# Altium PCB SolderingStation_V6.PcbDoc (part 2 of 2)
Units mm, origin at the board's own origin, x right, y up, seen from the top; angles counter-clockwise.
Board outline 138.15 x 60.81 mm, 2 copper layers (Top Layer, Bottom Layer), stack 1.671 mm thick; 179 components, 105 nets, 526 pads, 400 vias.
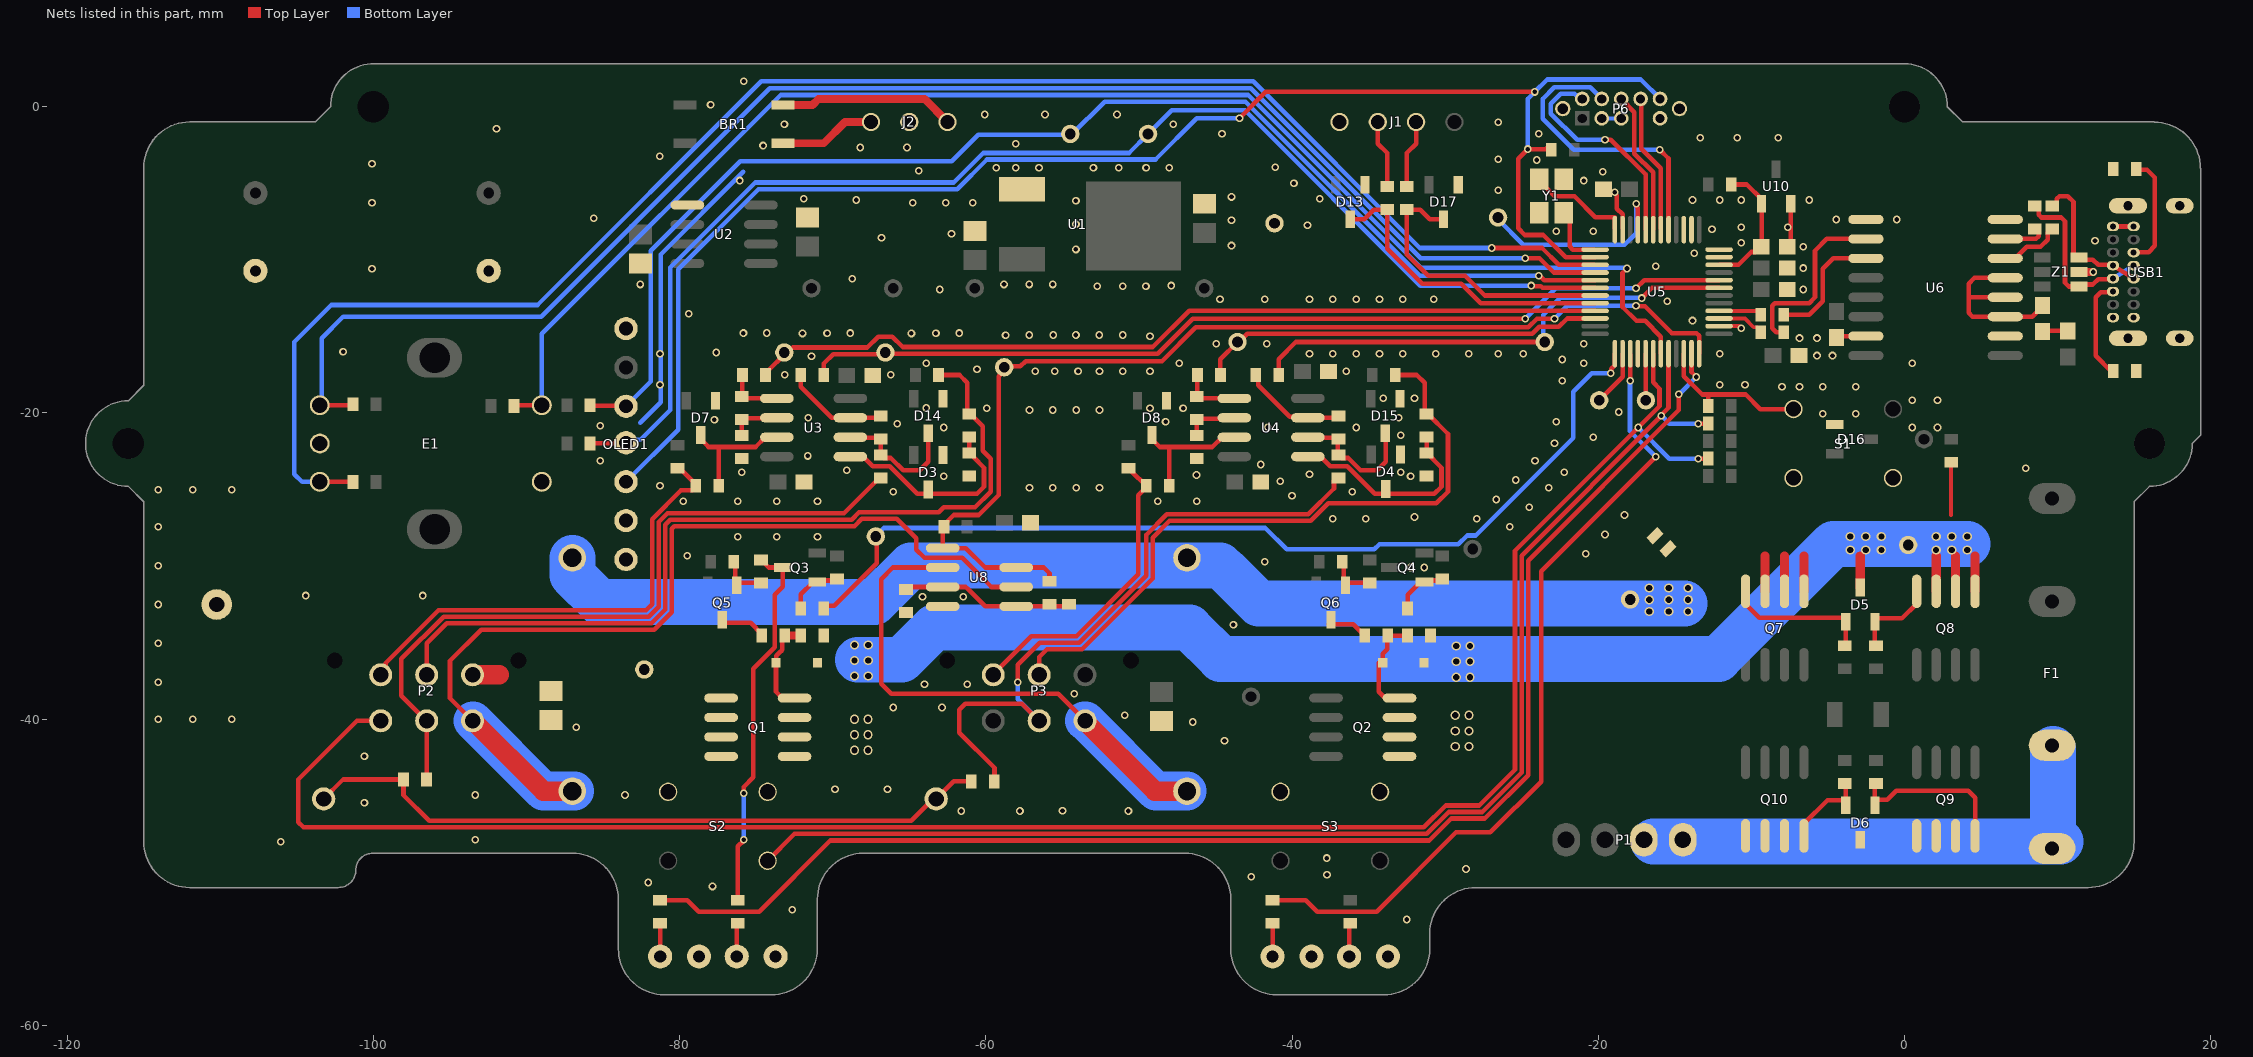
[diagram p2: the nets of this part, all layers, seen from the top]

## Via types
v1: diameter 0.5, hole 0.3, Top Layer to Bottom Layer, tented both sides, 337 vias
v2: diameter 0.6, hole 0.4, Top Layer to Bottom Layer, tented both sides, 63 vias

## Nets (pads, with @x,y where several pads share a name; then routed paths per layer and width w, separated by ;. In a path a pad name is that pad's centre, name@x,y a point inside that pad or via, vN(x,y) a via of type N, cw(c..) or ccw(c..) an arc to the next point about the centre after c; other vN are vias at no path point) (continued)
CH1_NTC: P3.6 R30.2 R55.1 | length 19.4
  Top Layer w0.3: P3.6@-59.515,-37.108 -59.515,-37.067 -57.027,-34.579 -54.075,-34.579 -50.038,-30.542 -50.038,-25.385 R30.2@-49.518,-24.865 ; R55.1@-50.46,-23.832 R30.2@-49.567,-24.725
CH1_NTC_B: R63.1 TP_NTC1.1 U5.34 | length 26.6
  Top Layer w0.3: R63.1@-44.678,-17.526 -44.678,-16.484 TP_NTC1.1@-43.561,-15.367 -43.47,-15.367 -42.935,-14.832 -24.311,-14.832 -23.849,-14.37 -22.575,-14.37 -22.037,-13.832 U5.34@-20.21,-13.832
CH1_Ret: P3.1 R26.2 U8.2 | length 42.7
  Top Layer w0.3: U8.2@-62.814,-30.099 -66.079,-30.099 -66.839,-30.859 -66.839,-37.696 -66.181,-38.354 -55.269,-38.354 P3.1@-53.515,-40.108
  Top Layer w1.27: P3.1@-53.562,-40.103 -48.961,-44.704 R26.2@-46.863,-44.704
  Bottom Layer w2.54: P3.1@-53.515,-40.108 -53.491,-40.108 -48.895,-44.704 R26.2@-46.863,-44.704
CH1_SB: D17.3 R65.1 U5.31 | length 19
  Top Layer w0.3: D17.3@-30.099,-7.348 -31.006,-7.348 -31.497,-6.857 -31.635,-6.719 R65.1@-32.512,-6.719 -32.512,-9.652 -31.115,-11.049 -28.702,-11.049 -27.419,-12.332 U5.31@-20.21,-12.332
CH1_SEL: R47.1 U5.39 | length 53.1
  Top Layer w0.3: R47.1@-41.275,-51.828 -39.104,-51.828 -38.354,-52.578 -34.477,-52.578 -29.292,-47.393 -27.042,-47.393 -23.727,-44.078 -23.727,-30.331 v1(-16.256,-22.86) ; U5.39@-17.91,-16.182 -17.907,-16.185 v1(-17.907,-17.907)
  Bottom Layer w0.3: v1(-17.907,-17.907) -17.926,-17.926 -17.926,-21.19 v1(-16.256,-22.86)
CH1_TC: R61.1 TP_TC1.1 U5.7 | length 32.9
  Top Layer w0.3: R61.1@-40.868,-17.526 -40.868,-16.484 -39.751,-15.367 TP_TC1.1@-23.495,-15.367 ; v1(-17.157,-12.499) -16.49,-11.832 U5.7@-12.11,-11.832
  Bottom Layer w0.3: TP_TC1.1@-23.495,-15.367 -23.595,-15.267 -23.595,-13.603 -22.806,-12.814 -22.472,-12.48 -17.176,-12.48 v1(-17.157,-12.499)
CH1_Thm+: P3.5 R14.1 R16.2 | length 43.5
  Top Layer w0.3: P3.5@-56.515,-37.108 -56.515,-35.941 -56.007,-35.433 -53.721,-35.433 -49.103,-30.815 -49.103,-28.148 -48.006,-27.051 -38.766,-27.051 -37.623,-25.908 -30.574,-25.908 -29.812,-25.146 -29.812,-21.375 R16.2@-31.109,-20.078 ; R14.1@-33.215,-17.526 -31.844,-17.526 -31.336,-18.034 R16.2@-31.336,-19.951
CH1_Thm-: P3.2 R23.1 R32.2 | length 43.6
  Top Layer w0.3: R32.2@-59.448,-44.069 -59.436,-44.057 -59.436,-43.18 -61.734,-40.882 -61.734,-39.382 -61.341,-38.989 -57.634,-38.989 P3.2@-56.515,-40.108 ; v1(-57.912,-37.592) -57.912,-36.449 -56.469,-35.006 -53.898,-35.006 -49.53,-30.638 -49.53,-27.971 -48.183,-26.624 -38.943,-26.624 -37.257,-24.938 -37.257,-24.445 -37.057,-24.245 R23.1@-36.957,-24.245
  Bottom Layer w0.3: v1(-57.912,-37.592) -57.912,-38.711 P3.2@-56.515,-40.108
CH2_ACT: Q3.3 R9.2 R52.2 | length 24.6
  Top Layer w0.3: R52.2@-76.2,-51.828 -76.2,-48.314 -75.819,-47.933 v1(-75.819,-47.879) ; v1(-75.819,-44.831) -75.819,-44.432 -75.184,-43.797 -75.184,-36.703 -73.787,-35.306 -73.787,-31.877 -73.261,-31.351 Q3.3@-73.261,-30.099 -74.18,-30.099 -74.376,-29.903 -74.376,-29.803 -74.576,-29.603 R9.2@-74.676,-29.603
  Bottom Layer w0.3: v1(-75.819,-47.879) v1(-75.819,-44.831)
CH2_BTN: R38.1 S2.2 U5.44 | length 86.2
  Top Layer w0.3: S2.2@-74.25,-49.25 -72.498,-47.498 -31.208,-47.498 -29.776,-46.066 -27.586,-46.066 -25.008,-43.488 -25.008,-29.326 v1(-15.875,-20.193) -15.875,-20.139 -15.41,-19.674 U5.44@-15.41,-16.132 ; v1(-13.462,-20.701) -12.853,-20.701 -12.834,-20.72 R38.1@-12.815,-20.701
  Bottom Layer w0.3: v1(-15.875,-20.193) -15.863,-20.193 -15.355,-20.701 v1(-13.462,-20.701)
CH2_DRV: R7.2 TP_D2.1 U5.37 | length 63.6
  Top Layer w0.3: R7.2@-70.586,-32.766 -70.586,-32.762 -70.426,-32.603 -69.903,-32.603 -67.126,-29.826 -67.126,-27.997 TP_D2.1@-67.183,-27.94 ; v1(-19.177,-17.399) -19.139,-17.361 -19.139,-17.111 -18.91,-16.882 U5.37@-18.91,-16.132
  Bottom Layer w0.3: TP_D2.1@-67.271,-28.374 TP_D2.1@-67.01,-28.113 ; TP_D2.1@-67.183,-27.94 -67.098,-27.94 -66.675,-27.517 -41.755,-27.517 -40.356,-28.915 -34.63,-28.915 -34.29,-28.575 -29.139,-28.575 -28.569,-28.005 -28.005,-28.005 -21.636,-21.636 -21.636,-18.619 -20.416,-17.399 v1(-19.177,-17.399)
CH2_Htr: C24.1 P2.4 Q1.5 Q1.6 Q1.7 Q1.8 TP_H2.1 | length 1.7
  Top Layer w1.27: P2.4@-93.505,-37.103 -91.783,-37.103
CH2_ID: P2.3 R64.1 U5.42 | length 127.6
  Top Layer w0.3: P2.3@-99.52,-40.108 -101.068,-40.108 -104.902,-43.942 -104.902,-46.736 -104.567,-47.071 -31.385,-47.071 -29.953,-45.639 -27.763,-45.639 -25.435,-43.311 -25.435,-28.991 v1(-17.399,-20.955) -16.002,-19.558 -16.002,-18.415 -16.41,-18.007 U5.42@-16.41,-16.132 ; v1(-13.462,-22.987) R64.1@-12.815,-22.987
  Bottom Layer w0.3: v1(-17.399,-20.955) -15.367,-22.987 v1(-13.462,-22.987)
CH2_NTC: P2.6 R29.2 R54.1 | length 30.6
  Top Layer w0.3: P2.6@-99.52,-37.108 -99.52,-36.783 -99.198,-36.461 -99.198,-36.333 -95.747,-32.882 -82.192,-32.882 -81.799,-32.489 -81.799,-26.95 -79.914,-25.065 -79.144,-25.065 -78.944,-24.865 -78.944,-24.665 R54.1@-79.837,-23.772
CH2_NTC_B: R62.1 TP_NTC2.1 U5.33 | length 57.3
  Top Layer w0.3: R62.1@-74.396,-17.526 -74.396,-17.426 -74.196,-17.226 -73.164,-16.194 TP_NTC2.1@-73.164,-16.055 ; TP_NTC2.1@-73.044,-16.174 -72.6,-15.73 -67.733,-15.73 -67.017,-15.014 -66.103,-15.014 -65.423,-15.693 -49.094,-15.693 -46.717,-13.316 U5.33@-20.982,-13.316 ; U5.33@-20.21,-13.332 -20.96,-13.332 -20.963,-13.335 U5.33@-20.982,-13.316 ; U5.33@-20.21,-13.316 U5.33@-20.982,-13.316
CH2_Ret: P2.1 R25.2 U8.6 | length 67.7
  Top Layer w0.3: P2.1@-93.525,-40.103 -94.996,-38.632 -94.996,-36.195 -92.964,-34.163 -81.661,-34.163 -80.518,-33.02 -80.518,-27.573 -80.342,-27.397 -68.576,-27.397 -68.103,-26.924 -65.807,-26.924 -64.537,-28.194 -64.537,-28.935 -64.006,-29.466 -61.531,-29.466 -59.628,-31.369 U8.6@-58.014,-31.369
  Top Layer w1.27: P2.1@-93.5,-40.103 -88.899,-44.704 R25.2@-87.007,-44.704
  Bottom Layer w2.54: P2.1@-93.496,-40.108 -88.9,-44.704 R25.2@-86.868,-44.704
CH2_SB: D13.3 R66.1 U5.32 | length 20.3
  Top Layer w0.3: D13.3@-36.195,-7.348 -35.288,-7.348 -34.659,-6.719 R66.1@-33.782,-6.719 -33.782,-9.271 -31.496,-11.557 -28.956,-11.557 -27.681,-12.832 U5.32@-20.21,-12.832
CH2_SEL: R50.2 U5.47 | length 93
  Top Layer w0.3: R50.2@-81.28,-51.828 -79.49,-51.828 -78.74,-52.578 -74.803,-52.578 -70.15,-47.925 -31.032,-47.925 -29.6,-46.493 -27.409,-46.493 -24.581,-43.665 -24.581,-29.661 -14.732,-19.812 -14.732,-18.796 v1(-14.751,-18.777) ; U5.47@-13.91,-16.132 -13.91,-17.332 v1(-13.589,-17.653)
  Bottom Layer w0.3: v1(-14.751,-18.777) -14.713,-18.777 v1(-13.589,-17.653)
CH2_TC: R60.1 TP_TC2.1 U5.8 | length 61.5
  Top Layer w0.3: R60.1@-70.586,-17.526 -70.586,-16.776 -69.967,-16.157 TP_TC2.1@-66.56,-16.157 ; TP_TC2.1@-66.56,-16.055 -66.486,-16.129 -48.768,-16.129 -46.482,-13.843 v1(-24.765,-13.843) ; v1(-17.538,-11.864) -17.006,-11.332 U5.8@-12.11,-11.332
  Bottom Layer w0.3: v1(-24.765,-13.843) -22.786,-11.864 v1(-17.538,-11.864)
CH2_Thm+: P2.5 R13.1 R15.2 | length 56.1
  Top Layer w0.3: P2.5@-96.52,-37.108 -96.52,-35.052 -95.204,-33.736 -81.838,-33.736 -80.945,-32.843 -80.945,-27.304 -80.611,-26.97 -68.753,-26.97 -68.28,-26.497 -63.073,-26.497 -62.738,-26.162 -60.706,-26.162 -59.69,-25.146 -59.69,-22.987 -60.198,-22.479 -60.198,-20.867 -60.987,-20.078 R15.2@-61.087,-20.078 -61.214,-19.951 -61.214,-18.034 -61.722,-17.526 R13.1@-63.093,-17.526
CH2_Thm-: P2.2 R21.1 R31.2 | length 47.9
  Top Layer w0.3: R31.2@-96.532,-43.942 -96.514,-43.924 P2.2@-96.514,-40.126 ; P2.2@-96.52,-40.108 -96.544,-40.108 -98.171,-38.481 -98.171,-36.068 -95.412,-33.309 -82.015,-33.309 -81.372,-32.666 -81.372,-27.127 -80.788,-26.543 -69.263,-26.543 -67.003,-24.284 R21.1@-66.926,-24.284
EARTH: ER1.1 ER2.1 R31.1 R32.1 | length 45.7
  Top Layer w0.3: ER2.1@-103.251,-45.212 -101.981,-43.942 R31.1@-98.032,-43.942 -98.032,-44.97 -96.358,-46.644 -64.868,-46.644 ER1.1@-63.24,-45.016 ; ER1.1@-63.246,-45.212 -62.103,-44.069 R32.1@-60.948,-44.069
EXTAL: U5.24 Y1.3 | length 6.8
  Top Layer w0.3: Y1.3@-23.86,-4.732 -23.86,-4.832 -22.85,-5.842 -21.552,-5.842 -20.185,-7.209 -18.931,-7.209 -18.91,-7.23 U5.24@-18.91,-7.982
EXTAL33: U5.15
GND: C1.1 C2.1 C3.2 C4.1 C5.1 C6.1 C8.2 C9.2 C10.2 C11.2 C13.1 C14.1 C15.1 C16.1 C18.1 C19.2 C20.1 C24.2 C25.2 D3.1 D4.1 D7.1 D8.1 D9.K D10.K D11.K D12.K D13.1 D14.1 D15.1 D16.1 D17.1 E1.C E1.D Gnd1.1 J1.4 J2.2 N1.1 NT1.2 OLED1.1 OLED1.2 OLED1.7 P6.0 P6.3 P6.5 P6.9 R17.1 R18.1 R35.1 R36.1 R69.1 S1.1 S1.1b S2.1 S2.1b S3.1 S3.1b U1.1 U2.5 U5.2 U5.11 U5.12 U5.23 U6.9 U6.15 U8.4 U10.2 Y1.2 Y1.4 | length 30.6
  Top Layer w0.254: P6.9@-15.961,-0.765 P6.9@-15.964,-0.762 P6.9@-15.94,-0.762 ; P6.0@-14.694,-0.329 P6.0@-14.694,-0.127 ; U5.2@-12.11,-14.332 -10.814,-14.332 v1(-10.668,-14.478)
  Top Layer w0.3: C14.1@-19.564,-5.726 C14.1@-19.564,-5.544 ; v1(-18.923,-5.588) -18.923,-5.642 -18.785,-5.78 -18.785,-6.661 -18.41,-7.036 U5.23@-18.41,-7.982 ; C18.1@-7.659,-9.144 -7.432,-8.917 U10.2@-7.432,-6.332 ; C16.1@-6.897,-16.256 C16.1@-6.731,-16.09 ; C20.1@-4.572,-14.986 U6.15@-2.087,-14.986
  Bottom Layer w0.254: P6.3@-19.774,-0.762 P6.5@-18.504,-0.762 ; P6.9@-15.964,-0.762 P6.9@-15.94,-0.762
  Bottom Layer w0.3: -82.583,-20.645 -81.242,-19.304 -81.242,-9.652 -75.834,-4.244
  other v1: -32.512,-53.086 -72.644,-52.451 -77.851,-50.927 -82.042,-50.673 -42.672,-50.292 -37.719,-50.165 -28.638,-49.786 -37.731,-49.075 -106.045,-48.006 -93.345,-47.879 -61.595,-46 -57.772,-46 -50.686,-46 -54.991,-45.974 -100.584,-45.466 -93.345,-44.958 -83.566,-44.958 -69.85,-44.577 -66.421,-44.577 -100.584,-42.418 -44.412,-41.402 -86.754,-40.538 -46.494,-40.185 -114.04,-40.012 -111.8,-40.012 -109.26,-40.012 -50.927,-39.751 -66.04,-39.243 -62.865,-39.243 -54.229,-38.354 -64.008,-37.719 -61.214,-37.719 -114.04,-37.592 -114.04,-35.052 -43.827,-33.835 -114.04,-32.512 -64.135,-32.004 -61.468,-32.004 -104.406,-31.93 -96.786,-31.93 -32.258,-30.099 -31.369,-30.099 -114.04,-29.972 -41.783,-29.718 -79.502,-29.337 -20.828,-29.21 -76.2,-28.086 -73.66,-28.086 -70.993,-28.086 -19.558,-27.94 -114.04,-27.432 -25.784,-27.429 -37.338,-26.924 -35.179,-26.924 -27.94,-26.924 -32.004,-26.797 -18.288,-26.67 -24.514,-26.159 -79.756,-25.781 -76.2,-25.781 -73.66,-25.781 -70.993,-25.781 -48.768,-25.781 -46.228,-25.781 -26.67,-25.654 -40.005,-25.4 -66.04,-25.146 -36.068,-25.146 -114.04,-25.012 -111.8,-25.012 -109.26,-25.012 -57.15,-24.892 -55.626,-24.892 -54.102,-24.892 -52.578,-24.892 -23.244,-24.889 -81.28,-24.765 -40.78,-24.46 -25.4,-24.384 -62.738,-24.13 -32.258,-24.13 -46.24,-24.056 -38.862,-24.003 -75.946,-23.876 -32.893,-23.876 -22.225,-23.876 -69.088,-23.749 7.912,-23.622 -42.037,-23.368 -85.179,-23.114 -24.13,-23.114 -71.64,-22.811 -22.86,-21.971 -20.32,-21.59 -32.893,-21.463 -62.738,-20.955 -35.814,-20.955 0.508,-20.955 2.159,-20.955 -41.593,-20.93 -85.179,-20.828 -65.786,-20.701 -48.26,-20.574 -22.733,-20.574 -77.724,-20.447 -71.589,-20.322 -33.02,-20.32 -5.334,-20.066 -3.175,-20.066 -18.669,-19.939 -57.15,-19.812 -55.626,-19.812 -54.102,-19.812 -52.578,-19.812 -63.881,-19.677 -59.944,-19.685 -49.276,-19.685 -47.117,-19.685 0.508,-19.177 2.159,-19.177 -34.036,-19.05 -32.004,-19.05 -8.001,-18.288 -6.858,-18.288 -5.334,-18.288 -3.175,-18.288 -81.28,-18.161 -12.065,-18.161 -10.414,-18.161 -22.352,-17.907 -73.139,-17.503 -66.204,-17.503 -56.769,-17.272 -55.499,-17.272 -53.975,-17.272 -52.578,-17.272 -51.054,-17.272 -49.276,-17.272 -36.449,-17.272 -60.579,-17.145 -63.881,-16.764 -47.371,-16.764 -20.955,-16.764 0.508,-16.764 -22.352,-16.51 -71.386,-16.309 -5.715,-16.256 -4.699,-16.256 -81.28,-16.129 -38.862,-16.129 -37.338,-16.129 -35.814,-16.129 -34.29,-16.129 -32.766,-16.129 -30.607,-16.129 -28.448,-16.129 -26.543,-16.129 -24.892,-16.129 -12.065,-16.129 -77.609,-16.055 -101.981,-16.002 -44.958,-15.494 -41.656,-15.494 -20.955,-15.494 -6.858,-15.113 -5.715,-15.113 -49.276,-14.986 -58.711,-14.937 -57.162,-14.912 -55.587,-14.912 -54.114,-14.912 -52.59,-14.912 -51.066,-14.912 -71.97,-14.81 -64.858,-14.81 -75.831,-14.785 -74.308,-14.783 -70.369,-14.787 -68.846,-14.785 -63.257,-14.787 -61.734,-14.785 -13.843,-13.97 -79.412,-13.515 -15.494,-12.7 -44.704,-12.573 -41.783,-12.573 -38.862,-12.573 -37.338,-12.573 -35.814,-12.573 -34.29,-12.573 -32.766,-12.573 -30.734,-12.573 -63.004,-11.94 -6.604,-11.938 -52.717,-11.737 -51.066,-11.737 -49.542,-11.737 -47.879,-11.684 -82.562,-11.61 -58.813,-11.61 -57.162,-11.61 -55.638,-11.61 -68.719,-11.229 -100.088,-10.594 -6.604,-10.541 -16.256,-10.414 -13.728,-9.578 -54.114,-9.324 -6.604,-9.144 -43.954,-9.07 -10.668,-8.89 -66.814,-8.562 -62.242,-8.308 -22.733,-8.128 -20.32,-8.128 -12.573,-8.001 -10.668,-7.874 -7.62,-7.874 -38.989,-7.747 -54.114,-7.673 -43.954,-7.419 -4.445,-7.366 -0.508,-7.366 -85.61,-7.292 -100.088,-6.268 -64.782,-6.276 -62.623,-6.276 -60.845,-6.276 -54.114,-6.149 -68.453,-6.096 -13.843,-6.096 -12.065,-6.096 -10.668,-6.096 -6.223,-6.096 -71.894,-6.022 -38.2,-6.018 -43.954,-5.895 -26.543,-5.461 -39.877,-5.002 -76.073,-4.826 -20.955,-4.826 -19.697,-4.244 -64.389,-4.191 -59.321,-3.99 -58.051,-3.99 -56.527,-3.99 -52.971,-3.99 -51.32,-3.99 -49.534,-3.979 -48.018,-3.99 -41.096,-3.961 -100.088,-3.736 -24.015,-3.482 -26.543,-3.429 -81.292,-3.228 -68.199,-2.667 -65.151,-2.667 -74.549,-2.54 -58.039,-2.413 -13.335,-2.032 -10.922,-2.032 -8.255,-2.032 -44.577,-1.778 -23.876,-1.778 -91.96,-1.45 -73.152,-1.143 -47.752,-1.143 -26.543,-1.016 -60.071,-0.508 -56.134,-0.508 -51.435,-0.508 -77.978,0.127 -75.819,1.651
Gnd_USB: C7.1 C17.1 R39.2 R41.2 U6.2 U6.8 USB1.A1 USB1.A12 USB1.B1 USB1.B12 USB1.SH Z1.2 | length 4.7
  Top Layer w0.3: C17.1@8.724,-14.986 C17.1@9.017,-14.693 ; C17.1@9.017,-14.74 9.113,-14.644 C7.1@10.668,-14.644 ; USB1.A12@13.62,-7.825 USB1.B1@14.97,-7.825
  Top Layer w0.508: C17.1@8.771,-14.986 C17.1@9.017,-14.74 ; Z1.2@11.398,-10.795 v1(12.319,-10.795)
  other v1: 12.446,-8.763
NetBR1_3: BR1.3 J2.3 | length 6.3
  Top Layer w0.508: BR1.3@-73.254,-2.393 -70.592,-2.393 -69.199,-1 J2.3@-67.5,-1
NetBR1_4: BR1.4 J2.1 | length 11.5
  Top Layer w0.508: BR1.4@-73.254,0.107 -71.321,0.107 -70.92,0.508 -64.008,0.508 J2.1@-62.5,-1
NetD1_A: D1.A Q1.4 R1.1 R5.2 | length 5.6
  Top Layer w0.3: D1.A@-73.622,-36.322 D1.A@-73.654,-36.322 ; Q1.4@-73.292,-38.624 -73.702,-38.214 D1.A@-73.702,-36.322 D1.A@-73.654,-36.322 ; R5.2@-73.126,-34.544 -73.286,-34.703 -73.286,-35.478 -73.368,-35.56 -73.385,-35.56 -73.689,-35.863 -73.689,-36.287 D1.A@-73.654,-36.322
  Top Layer w0.508: R5.2@-73.126,-34.544 R1.1@-72.086,-34.544
NetD2_A: D2.A Q2.4 R2.1 R6.2 | length 6
  Top Layer w0.3: D2.A@-34.332,-36.322 -34.332,-38.214 Q2.4@-33.922,-38.624 ; D2.A@-34.078,-36.322 -34.078,-35.729 -33.782,-35.433 -33.782,-34.73 R6.2@-33.655,-34.603 ; D2.A@-34.065,-36.287 -34.065,-35.863 ; R6.2@-33.655,-34.609 R6.2@-33.655,-34.603 ; R2.1@-32.462,-34.544 -33.596,-34.544 R6.2@-33.655,-34.603
NetD3_3: D3.3 R15.1 R17.2 U3.5 | length 13.6
  Top Layer w0.3: U3.5@-68.809,-22.86 -68.009,-22.86 -67.374,-23.495 -66.263,-23.495 -64.485,-25.273 -63.754,-25.273 -60.579,-25.273 -60.117,-24.811 -60.117,-23.576 -60.787,-22.906 -60.787,-22.818 -60.987,-22.618 R17.2@-61.087,-22.618 R15.1@-61.087,-21.578
NetD4_3: D4.3 R16.1 R18.2 U4.5 | length 13.6
  Top Layer w0.3: U4.5@-38.969,-22.86 -38.266,-22.86 U4.5@-38.127,-22.999 ; U4.5@-38.131,-22.86 -37.496,-23.495 -36.385,-23.495 -34.607,-25.273 -30.701,-25.273 -30.239,-24.811 -30.239,-23.576 R18.2@-31.203,-22.612 ; R18.2@-31.209,-22.618 R16.1@-31.209,-21.578
NetD5_1: D5.1 Q7.4 R19.2 | length 9.4
  Top Layer w0.3: Q7.4@-10.376,-31.652 -10.376,-32.504 -9.493,-33.387 -4.006,-33.387 -3.833,-33.56 D5.1@-3.833,-33.653 -3.833,-35.014 R19.2@-3.899,-35.08
NetD5_2: D5.2 Q8.4 R20.2 | length 5.5
  Top Layer w0.3: R20.2@-1.867,-35.08 -1.933,-35.014 D5.2@-1.933,-33.653 -1.933,-33.59 -1.76,-33.417 -0.165,-33.417 0.8,-32.452 Q8.4@0.8,-31.652
NetD6_1: D6.1 Q9.4 R28.1 | length 10.9
  Top Layer w0.3: D6.1@-1.933,-45.627 D6.1@-1.933,-45.352 ; R28.1@-1.933,-44.266 D6.1@-1.933,-45.352 ; Q9.4@4.61,-47.628 4.61,-45.125 4.163,-44.679 -0.543,-44.679 -1.127,-45.263 -1.844,-45.263 D6.1@-1.933,-45.352
NetD6_2: D6.2 Q10.4 R27.1 | length 5.1
  Top Layer w0.3: Q10.4@-6.566,-46.828 -5.026,-45.288 -4.006,-45.288 -3.833,-45.461 D6.2@-3.833,-45.627 -3.833,-44.266 R27.1@-3.899,-44.2
NetD7_3: D7.3 R29.1 U3.3 | length 8.6
  Top Layer w0.3: D7.3@-78.613,-21.445 -78.613,-21.72 -78.137,-22.196 -78.137,-22.225 -77.444,-22.225 -75.044,-22.225 -74.409,-21.59 U3.3@-73.609,-21.59 ; R29.1@-77.444,-25.019 -77.444,-22.226
NetD8_3: D8.3 R30.1 U4.3 | length 8.7
  Top Layer w0.3: D8.3@-49.149,-21.445 -49.149,-21.72 -48.644,-22.225 -47.987,-22.225 ; R30.1@-48.018,-24.765 -48.018,-22.256 -47.987,-22.225 ; U4.3@-43.769,-21.59 -44.569,-21.59 -45.204,-22.225 -47.987,-22.225
NetD9_A: D9.A R47.2 | length 2.3
  Top Layer w0.3: R47.2@-41.275,-53.328 -41.27,-53.333 D9.A@-41.27,-55.5 D9.A@-41.184,-55.414
NetD10_A: D10.A R49.1 | length 2.4
  Top Layer w0.3: R49.1@-36.195,-53.328 -36.27,-53.403 D10.A@-36.27,-55.5 D10.A@-36.118,-55.348
NetD11_A: D11.A R50.1 | length 2.2
  Top Layer w0.3: R50.1@-81.28,-53.328 -81.27,-53.338 D11.A@-81.27,-55.5 D11.A@-81.25,-55.48
NetD12_A: D12.A R52.1 | length 2.3
  Top Layer w0.3: D12.A@-76.21,-55.44 D12.A@-76.27,-55.5 -76.27,-53.398 R52.1@-76.2,-53.328
NetD14_3: D14.3 R21.2 R22.1 U3.6 | length 9
  Top Layer w0.3: U3.6@-68.809,-21.59 -68.767,-21.632 -66.865,-21.632 R22.1@-66.683,-21.632 ; R22.1@-66.683,-21.705 R22.1@-66.865,-21.705 R21.2@-66.865,-22.745 -66.665,-22.945 -66.209,-22.945 -65.405,-23.749 -64.311,-23.749 -63.754,-23.192 D14.3@-63.754,-21.318
NetD15_3: D15.3 R23.2 R24.1 U4.6 | length 8.3
  Top Layer w0.3: U4.6@-38.969,-21.59 -38.927,-21.632 R24.1@-37.127,-21.632 ; R24.1@-37.076,-21.705 -37.02,-21.762 -37.02,-22.693 R23.2@-37.071,-22.745 ; R23.2@-36.787,-22.945 -36.331,-22.945 -35.527,-23.749 -34.433,-23.749 -33.876,-23.192 D15.3@-33.876,-21.318
NetF1_1: F1.1 F1.1a P1.3 P1.4 | length 32.4
  Bottom Layer w3: P1.3@-16.383,-48 -14.478,-48 9.64,-48 F1.1@10.198,-48 ; F1.1@9.69,-47.828 F1.1a@9.69,-41.963
NetJ1_2: J1.2 R65.2 | length 4.5
  Top Layer w0.3: R65.2@-32.512,-5.219 -32.512,-3.028 -31.897,-2.413 J1.2@-31.897,-1
NetJ1_3: J1.3 R66.2 | length 4.5
  Top Layer w0.3: J1.3@-34.397,-1 -34.397,-2.413 -33.782,-3.028 R66.2@-33.782,-5.219
NetQ3_1: Q3.1 R3.2 R7.1 | length 3.7
  Top Layer w0.3: R7.1@-72.086,-32.766 -72.086,-31.849 -71.286,-31.049 Q3.1@-71.011,-31.049 -70.911,-30.949 -69.823,-30.949 R3.2@-69.723,-30.849
NetQ4_1: Q4.1 R4.2 R8.1 | length 3.8
  Top Layer w0.3: R8.1@-32.462,-32.766 -32.441,-32.745 -32.441,-31.866 -31.624,-31.049 Q4.1@-31.349,-31.049 -31.249,-30.949 R4.2@-29.934,-30.949
NetQ5_1: Q5.1 R9.1 R11.1 | length 3.3
  Top Layer w0.3: R11.1@-76.466,-29.718 -76.366,-29.818 -76.366,-31.16 Q5.1@-76.266,-31.26 -76.266,-31.253 -76.116,-31.103 R9.1@-74.676,-31.103
NetQ5_3: Q5.3 R5.1 | length 3.1
  Top Layer w0.3: Q5.3@-77.216,-33.51 -77.216,-33.56 -77.066,-33.71 -75.36,-33.71 -74.626,-34.444 R5.1@-74.626,-34.544
NetQ6_1: Q6.1 R10.1 R12.1 | length 3.1
  Top Layer w0.3: R12.1@-36.715,-29.718 -36.615,-29.818 -36.615,-31.16 Q6.1@-36.515,-31.26 ; Q6.1@-36.365,-31.103 R10.1@-34.925,-31.103
NetQ6_3: Q6.3 R6.1 | length 2.6
  Top Layer w0.3: Q6.3@-37.592,-33.81 -35.99,-33.81 R6.1@-35.256,-34.544
NetR22_2: R22.2 R60.2 U3.7 | length 6.7
  Top Layer w0.3: R60.2@-72.086,-17.526 -72.086,-18.3 -70.068,-20.318 -68.811,-20.318 -68.809,-20.32 R22.2@-67.003,-20.32
NetR24_2: R24.2 R61.2 U4.7 | length 6.8
  Top Layer w0.3: R61.2@-42.368,-17.526 -42.21,-17.684 -42.21,-18.204 -40.151,-20.263 -39.026,-20.263 U4.7@-38.969,-20.32 -37.191,-20.32 R24.2@-37.076,-20.205
NetR33_1: R33.1 R35.2 U3.2 | length 3.4
  Top Layer w0.3: R35.2@-75.946,-21.475 R33.1@-75.946,-20.435 ; R33.1@-75.908,-20.435 -75.835,-20.362 -73.651,-20.362 U3.2@-73.609,-20.32
NetR33_2: R33.2 R62.2 U3.1 | length 4.4
  Top Layer w0.3: R33.2@-75.908,-19.05 -73.609,-19.05 -73.005,-19.05 U3.1@-72.959,-19.004 ; R33.2@-75.908,-18.935 -75.896,-18.923 R62.2@-75.896,-17.526
NetR34_1: R34.1 R36.2 U4.2 | length 3.5
  Top Layer w0.3: R36.2@-46.228,-21.475 R34.1@-46.228,-20.435 -46.17,-20.377 -43.826,-20.377 U4.2@-43.769,-20.32
NetR34_2: R34.2 R63.2 U4.1 | length 4.5
  Top Layer w0.3: R34.2@-46.19,-19.05 U4.1@-43.769,-19.05 -43.261,-19.05 U4.1@-43.159,-18.949 ; R34.2@-46.19,-18.935 -46.178,-18.923 R63.2@-46.178,-17.526
NetR39_1: R39.1 USB1.A5 | length 6.6
  Top Layer w0.3: R39.1@13.539,-17.272 13.489,-17.272 12.484,-16.267 12.484,-12.446 12.809,-12.121 13.574,-12.121 USB1.A5@13.62,-12.075
NetR41_1: R41.1 USB1.B5 | length 7.5
  Top Layer w0.3: USB1.B5@14.97,-9.525 14.998,-9.497 15.941,-9.497 16.346,-9.092 16.346,-4.624 15.837,-4.115 15.19,-4.115 R41.1@15.139,-4.064
NetR42_1: R42.1 U6.11 | length 8.2
  Top Layer w0.3: R42.1@-7.886,-13.589 -6.223,-13.589 -5.334,-12.7 -5.334,-10.59 -4.65,-9.906 U6.11@-2.468,-9.906
NetR43_1: R43.1 U6.10 | length 12.1
  Top Layer w0.3: R43.1@-7.886,-14.732 -8.382,-14.732 -8.636,-14.478 -8.636,-13.003 -8.46,-12.827 -6.223,-12.827 -5.842,-12.446 -5.842,-9.398 -5.08,-8.636 U6.10@-2.468,-8.636
NetR56_1: R56.1 U6.7 | length 3.5
  Top Layer w0.3: U6.7@5.832,-8.636 6.532,-8.636 8.587,-8.636 8.763,-8.46 R56.1@8.763,-8.001
NetR57_1: R57.1 U6.6 | length 5
  Top Layer w0.3: U6.6@5.751,-9.906 6.532,-9.906 7.232,-9.906 7.987,-9.151 8.883,-9.151 9.352,-8.682 9.352,-8.189 9.552,-7.989 R57.1@9.652,-7.989
NetR68_1: R68.1 R69.2 R70.1 U8.3 U8.5 | length 11.1
  Top Layer w0.3: R69.2@-65.113,-31.369 U8.3@-62.814,-31.369 -61.303,-31.369 -61.177,-31.495 -60.033,-32.639 U8.5@-58.014,-32.639 -55.842,-32.639 R68.1@-54.572,-32.639
OVERCURRENT: R67.1 R70.2 TP_OC.1 U5.48 U8.1 U8.7 | length 71.6
  Top Layer w0.3: TP_OC.1@-58.815,-17.197 TP_OC.1@-58.801,-17.183 ; TP_OC.1@-58.801,-17.197 -58.801,-17.262 -59.143,-17.604 -59.143,-25.361 -60.452,-26.67 -62.106,-26.67 -62.526,-27.09 -62.526,-27.132 -62.625,-27.231 -62.814,-27.231 U8.1@-62.814,-28.829 -61.303,-28.829 -60.033,-30.099 U8.7@-58.014,-30.099 -56.223,-30.099 -55.842,-30.48 R70.2@-55.842,-31 ; TP_OC.1@-58.801,-17.018 -58.744,-16.961 -57.751,-16.961 -57.404,-16.614 -48.491,-16.614 -46.282,-14.405 -24.565,-14.405 -24.003,-13.843 v1(-22.86,-13.843) ; v1(-17.538,-13.007) -17.519,-13.026 -16.946,-13.026 -15.187,-14.785 -13.586,-14.785 -13.41,-14.961 U5.48@-13.41,-16.132
  Bottom Layer w0.3: v1(-22.86,-13.843) -22.024,-13.007 v1(-17.538,-13.007)
PGND: D6.3 NT1.1 Q9.1 Q9.2 Q9.3 Q10.1 Q10.2 Q10.3 R25.1 R26.1 TP_PGND.1 | length 76
  Bottom Layer w3: R25.1@-87.007,-29.464 -87.007,-30.585 -85.25,-32.342 -67.267,-32.342 -64.897,-29.972 -46.863,-29.972 -44.704,-29.972 ; -44.335,-30.279 -42.176,-32.438 -17.919,-32.438 -16.667,-32.438 -14.363,-32.438
  other v2: -16.667,-32.969 -15.397,-32.969 -14.127,-32.969 -16.667,-32.207 -15.397,-32.207 -14.127,-32.207 -16.667,-31.445 -15.397,-31.445 -14.127,-31.445
QUAD_A: E1.B R44.1 U5.28 | length 101.5
  Top Layer w0.3: E1.B@-103.5,-19.5 -101.53,-19.5 R44.1@-101.334,-19.304 ; v1(-24.765,-9.906) -23.839,-9.906 -22.913,-10.832 U5.28@-20.26,-10.832
  Bottom Layer w0.3: E1.B@-103.5,-19.5 -103.378,-19.378 -103.378,-15.113 -101.981,-13.716 -89.027,-13.716 -74.104,1.207 -42.705,1.207 -31.592,-9.906 v1(-24.765,-9.906)
QUAD_B: E1.A R46.1 U5.27 | length 109.6
  Top Layer w0.3: E1.A@-103.5,-24.5 -101.45,-24.5 R46.1@-101.334,-24.384 ; v1(-26.963,-9.232) -23.675,-9.232 -22.575,-10.332 U5.27@-20.26,-10.332
  Bottom Layer w0.3: E1.A@-103.5,-24.5 -104.659,-24.5 -105.156,-24.003 -105.156,-15.367 -102.743,-12.954 -89.281,-12.954 -74.676,1.651 -42.545,1.651 -31.662,-9.232 v1(-26.963,-9.232)
QUAD_BTN: E1.E R45.1 U5.43 | length 95.6
  Top Layer w0.3: R45.1@-90.817,-19.558 -90.759,-19.5 E1.E@-89,-19.5 ; v1(-18.122,-10.569) -18.415,-10.861 -18.415,-13.081 -17.505,-13.991 -16.94,-13.991 -15.91,-15.021 U5.43@-15.91,-16.132
  Bottom Layer w0.3: E1.E@-89,-19.5 -89,-14.832 -73.406,0.762 -42.864,0.762 -31.58,-10.522 -18.169,-10.522 v1(-18.122,-10.569)
RESETb: OLED1.3 P6.10 R59.1 U5.26 | length 101.9
  Top Layer w0.3: v1(-43.434,-0.762) -41.709,0.963 v1(-24.142,0.963) ; R59.1@-23.064,-2.819 -23.267,-2.616 -23.42,-2.769 v1(-24.6,-2.769) -25.235,-3.404 -25.235,-7.95 -24.803,-8.382 -23.584,-8.382 -22.134,-9.832 U5.26@-20.21,-9.832
  Bottom Layer w0.3: OLED1.3@-83.5,-24.492 -80.099,-21.091 -80.099,-10.63 -74.849,-5.38 -61.854,-5.38 -59.926,-3.452 -48.918,-3.452 -46.228,-0.762 v1(-43.434,-0.762) ; v1(-24.6,-2.769) -24.6,0.505 v1(-24.142,0.963) -23.327,1.778 -17.234,1.778 P6.10@-15.964,0.508
SCL: OLED1.5 R53.1 TP_SCL.1 U5.29 | length 83.7
  Top Layer w0.3: R53.1@-85.85,-19.5 -85.814,-19.536 OLED1.5@-83.536,-19.536 ; v1(-23.876,-11.049) -23.822,-11.049 -23.539,-11.332 U5.29@-20.21,-11.332
  Bottom Layer w0.3: OLED1.5@-83.5,-19.572 -81.877,-17.949 -81.877,-9.398 -76.035,-3.556 -62.214,-3.556 -60.489,-1.831 -54.409,-1.831 -52.243,0.335 -43.041,0.335 -31.657,-11.049 v1(-23.876,-11.049)
SDA: OLED1.4 R51.1 TP_SDA.1 U5.30 | length 84.9
  Top Layer w0.3: R51.1@-85.85,-22 -85.826,-21.976 OLED1.4@-83.524,-21.976 ; v1(-24.384,-11.684) -24.346,-11.722 -23.752,-11.722 -23.643,-11.832 U5.30@-20.21,-11.832
  Bottom Layer w0.3: OLED1.4@-83.5,-21.952 -83.315,-21.767 -82.562,-21.767 -80.607,-19.812 -80.607,-10.503 -75.057,-4.953 -62.103,-4.953 -60.175,-3.025 -50.65,-3.025 TP_SDA.1@-49.403,-1.778 -47.86,-0.235 -43.074,-0.235 -31.625,-11.684 v1(-24.384,-11.684)
SEL_BTN: R37.1 S1.2 U5.46 | length 10.2
  Top Layer w0.3: U5.46@-14.41,-16.132 -14.41,-17.594 -13.208,-18.796 -10.363,-18.796 -9.409,-19.75 S1.2@-7.25,-19.75 ; -12.827,-18.923 -12.827,-19.546 R37.1@-12.815,-19.558
  Bottom Layer w0.3: S1.2@-7.25,-19.75 S1.2@-7.188,-19.812
SPARE1: T1.1 U5.21 | length 13.8
  Top Layer w0.3: v1(-17.526,-6.35) -17.488,-6.388 -17.488,-6.53 -17.41,-6.607 U5.21@-17.41,-8.032
  Bottom Layer w0.3: T1.1@-26.543,-7.239 -26.543,-7.366 -24.892,-9.017 -18.288,-9.017 -17.526,-8.255 v1(-17.526,-6.35)
SPARE2: T2.1 U5.38 | length 3.7
  Top Layer w0.3: T2.1@-19.939,-19.177 -18.41,-17.648 U5.38@-18.41,-16.132
SPARE3: T3.1 U5.41 | length 3.1
  Top Layer w0.3: U5.41@-16.91,-16.132 -16.91,-19.031 -16.891,-19.05 T3.1@-16.891,-19.177
SPARE4: U5.40
SWD_CLK: P6.4 U5.17 | length 19.7
  Top Layer w0.3: v1(-15.984,-2.812) -15.41,-3.386 U5.17@-15.41,-7.982
  Bottom Layer w0.3: P6.4@-19.774,0.508 -20.531,1.265 -22.869,1.265 -23.629,0.505 -23.629,-0.789 -21.606,-2.812 v1(-15.984,-2.812)
SWD_DIO: P6.2 U5.20 | length 14.5
  Top Layer w0.3: v1(-19.558,-2.159) -19.554,-2.163 -19.173,-2.163 -16.91,-4.426 U5.20@-16.91,-8.032
  Bottom Layer w0.3: P6.2@-21.044,0.508 -21.222,0.508 -21.55,0.836 -22.45,0.836 -23.091,0.195 -23.091,-0.449 -21.381,-2.159 v1(-19.558,-2.159)
SWD_Rx: P6.8 U5.18 | length 9
  Top Layer w0.3: P6.8@-17.234,0.508 -17.183,0.457 -17.183,-2.756 -15.91,-4.029 U5.18@-15.91,-7.982
SWD_Tx: P6.6 U5.19 | length 9.4
  Top Layer w0.3: P6.6@-18.504,0.508 -17.64,-0.356 -17.64,-3.061 -16.41,-4.291 U5.19@-16.41,-8.032
USBD_N: R42.2 U5.4 | length 2.9
  Top Layer w0.254: U5.4@-12.11,-13.332 -9.609,-13.332 -9.386,-13.555 R42.2@-9.386,-13.589
USBD_P: R43.2 U5.3 | length 3.1
  Top Layer w0.254: U5.3@-12.102,-13.84 -10.417,-13.84 -9.848,-14.409 -9.609,-14.409 -9.386,-14.632 R43.2@-9.386,-14.732
USBD_R_N: R57.2 USB1.A7 USB1.B7 Z1.3 | length 10.1
  Top Layer w0.3: R57.2@9.652,-6.489 9.752,-6.489 9.952,-6.289 9.952,-6.018 10.128,-5.842 10.675,-5.842 11.04,-6.207 11.04,-9.67 11.215,-9.845 Z1.3@11.398,-9.845 ; Z1.3@11.332,-9.911 11.406,-9.985 12.309,-9.985 12.653,-10.329 13.574,-10.329 USB1.A7@13.62,-10.375 USB1.B7@14.97,-11.225
  Bottom Layer w0.3: USB1.A7@13.443,-10.375 USB1.A7@13.62,-10.375
USBD_R_P: R56.2 USB1.A6 USB1.B6 Z1.1 | length 11.9
  Top Layer w0.3: R56.2@8.509,-6.489 8.571,-6.489 8.771,-6.689 8.771,-7.063 8.947,-7.239 10.238,-7.239 10.486,-7.486 10.486,-11.502 10.729,-11.745 Z1.1@11.276,-11.745 ; Z1.1@11.398,-11.745 Z1.1@11.276,-11.745 ; USB1.A6@13.62,-11.225 13.58,-11.265 12.649,-11.265 12.298,-11.616 11.406,-11.616 Z1.1@11.276,-11.745
  Bottom Layer w0.3: USB1.A6@13.559,-11.164 USB1.A6@13.62,-11.225 USB1.B6@14.97,-10.375
Vdd1: C17.2 U6.3 U6.4 U6.5 | length 11.7
  Top Layer w0.3: U6.3@6.532,-13.716 4.445,-13.716 4.191,-13.462 4.191,-12.509 ; U6.4@6.532,-12.446 4.255,-12.446 4.191,-12.509 ; U6.5@6.532,-11.176 4.572,-11.176 4.191,-11.557 4.191,-12.509 ; U6.3@6.913,-13.716 8.344,-13.716 9.017,-13.043 C17.2@9.017,-12.993
Vpp: D1.K D2.K D5.3 Q1.1 Q1.2 Q1.3 Q2.1 Q2.2 Q2.3 Q7.1 Q7.2 Q7.3 Q8.1 Q8.2 Q8.3 R1.2 R2.2 R58.1 TP_Vpp.1 | length 96.6
  Top Layer w0.254: 3.048,-26.67 R58.1@3.048,-23.229
  Top Layer w0.6: Q7.3@-9.106,-31.652 -9.106,-29.353 ; Q7.2@-7.836,-31.652 -7.836,-29.353 ; Q7.1@-6.566,-31.652 -6.566,-29.353 ; D5.3@-2.883,-31.403 -2.883,-29.353 ; Q8.3@2.07,-31.652 2.07,-29.353 ; Q8.2@3.34,-31.652 3.34,-29.353 ; Q8.1@4.61,-31.652 4.61,-29.353
  Bottom Layer w3: v2@-68.338,-36.123 -65.492,-36.123 -63.395,-34.026 -46.708,-34.026 -44.666,-36.068 -30.467,-36.068 -28.385,-36.068 -12.154,-36.068 -4.634,-28.548 -3.543,-28.548 -1.511,-28.548 0.242,-28.548 2.07,-28.548 4.102,-28.548
  other v2: -68.58,-42.037 -67.691,-42.037 -29.337,-41.783 -28.448,-41.783 -68.58,-41.021 -67.691,-41.021 -29.337,-40.767 -28.448,-40.767 -68.58,-40.005 -67.691,-40.005 -29.337,-39.751 -28.448,-39.751 -29.274,-37.262 -28.385,-37.262 -68.567,-37.186 -67.678,-37.186 -29.274,-36.246 -28.385,-36.246 -68.567,-36.17 -67.678,-36.17 -29.274,-35.23 -28.385,-35.23 -68.567,-35.154 -67.678,-35.154 -3.543,-28.956 -2.527,-28.956 -1.511,-28.956 2.07,-28.956 3.086,-28.956 4.102,-28.956 -3.543,-28.067 -2.527,-28.067 -1.511,-28.067 2.07,-28.067 3.086,-28.067 4.102,-28.067
VrefH: C18.2 R48.2 U5.10 U10.1 | length 8.8
  Top Layer w0.3: U5.10@-12.11,-10.332 -10.84,-10.332 -10.002,-9.494 -9.759,-9.494 -9.626,-9.361 C18.2@-9.626,-8.932 ; R48.2@-11.315,-5.08 -10.309,-5.08 -9.332,-6.057 U10.1@-9.332,-6.332 C18.2@-9.332,-9.117 ; C18.2@-9.359,-9.144 C18.2@-9.332,-9.117 ; C18.2@-9.332,-9.144 C18.2@-9.332,-9.117
XTAL: U5.25 Y1.1 | length 4
  Top Layer w0.3: Y1.1@-22.26,-6.932 -21.872,-7.32 -21.872,-9.114 -21.654,-9.332 U5.25@-20.26,-9.332
XTAL32: U5.14
pads on no net: E1.0 P2.0 P3.0 S1.2b S2.2b S3.2b SP1.3 SP2.0 SP3.0 SP4.0 U2.4 U2.8 U10.3 USB1.A8 USB1.B8 Z1.4 Z1.6

## Polygon pours and split planes (outlines as drawn)
GND on Top Layer "Top Layer-GND" (solid, remove dead copper, pour order 16): 2.54,2.799 2.54,-18.796 19.344,-18.796 19.286,-58 -118.872,-58 -118.872,2.799
PGND on Top Layer "Top Layer-PGND 1" (solid, remove dead copper, pour order 15): -21.844,-44.437 -26.988,-49.581 -26.988,-51.054 -13.192,-51.054 -13.17,-51.076 15.119,-51.076 15.119,-25.4 -12.651,-25.4 -21.844,-34.679
Gnd_USB on Top Layer "GND_USB_L01_P019" (solid, remove dead copper, pour order 19): 19.355,-2.159 19.355,-18.415 3.048,-18.415 3.048,-2.159
CH1_Htr on Top Layer "Top Layer-CH1_Htr" (solid, pour order 7): -53.721,-38.194 -52.799,-39.116 -42.258,-39.116 -41.115,-40.259 -41.115,-43.434 -35.527,-43.434 -35.527,-34.544 -52.451,-34.544 -53.721,-35.814
Vpp on Top Layer "Top Layer-Vpp2" (solid, pour order 4): -27.645,-42.748 -28.382,-43.485 -28.385,-43.485 -35.888,-43.485 -35.888,-31.75 -27.645,-31.75
CH2_Htr on Top Layer "Top Layer-CH2_Htr" (solid, pour order 10): -93.853,-38.062 -92.799,-39.116 -82.258,-39.116 -81.115,-40.259 -81.115,-43.434 -75.527,-43.434 -75.527,-34.544 -92.418,-34.544 -93.853,-35.979
Vpp on Top Layer "Top Layer-Vpp3" (solid, pour order 6): -75.349,-31.496 -75.349,-43.434 -67.145,-43.434 -67.145,-31.496
-9V on Top Layer "Top Layer -9V" (solid, pour order 8): -81,-7 -73,-7 -73,-13 -81,-13
AC24a on Top Layer "Top Layer-AC24a" (solid, pour order 2): -11.715,-36.299 -2.806,-36.299 -2.806,-42.979 -11.715,-42.979
AC24b on Top Layer "Top Layer-AC24b" (solid, pour order 1): -2.806,-36.299 6.236,-36.299 6.236,-42.979 -2.806,-42.979
Vpp on Top Layer "Top Layer-Vpp1" (solid, pour order 3): 5.842,-31.854 -11.011,-31.854 -11.011,-25.4 5.842,-25.4
GND on Bottom Layer "Bottom Layet = Gnd" (solid, remove dead copper, pour order 18): 2.54,2.799 2.54,-18.796 19.329,-18.796 19.329,-58 -118.872,-58 -118.872,2.799
Gnd_USB on Bottom Layer "GND_USB_L02_P020" (solid, remove dead copper, pour order 20): 3.048,-2.032 19.329,-2.032 19.329,-18.415 3.048,-18.415

## Keep-outs
Keep-Out Layer:
  lines w0.2: -116,-24.8 cw(c-116,-22) -116,-19.2 ; -115,-25.8 -115,-48 ccw(c-112,-48) -112,-51 -102.286,-51 ccw(c-102.286,-49.862) -101.148,-49.862 cw(c-100.048,-49.862) -100.048,-48.762 ; -115,-18.2 -115,-4 cw(c-112,-4) -112,-1 ; -111.963,-1 -103.8,-1 -102.8,0 cw(c-100,0) -99.926,2.799 0,2.814 ; -100.048,-48.765 -87,-48.765 cw(c-87,-51.765) -84,-51.765 -84,-55 ; 0,2.8 cw(c0,0) 2.8,0 3.8,-1 16.329,-1 ; 15,-25.8 15,-48 cw(c12,-48) 12,-51 -28,-51 ccw(c-28,-54) -31,-54 -31,-55 cw(c-34,-55) -34,-58 -41,-58 cw(c-41,-55) -44,-55 ; 16,-24.8 ccw(c16,-22) 18.8,-22 19.355,-21.445 ; 16.329,-1.013 cw(c16.329,-4.013) 19.329,-4.013 ; 19.34,-21.445 19.34,-4.013 ; -84,-55 ccw(c-81,-55) -81,-58 -74,-58 ccw(c-74,-55) -71,-55 -71,-51.765 cw(c-68,-51.765) -68,-48.765 -47,-48.765 cw(c-47,-51.765) -44,-51.765 -44,-55 ; -84,-55 -84,-55 ; -44,-55 -44,-55
  lines w0.254: -116,-24.8 -115,-25.8 ; -116,-19.2 -115,-18.2 ; 15,-25.8 16,-24.8

## Other copper
Bottom Layer:
  rectangle net Vpp: -81.242,-43.434 -67.068,-34.622
  rectangle net Vpp: -41.11,-43.434 -27.013,-34.798

## Silkscreen, mask and mechanical layers (free items; w line width, h text height)
Top Overlay:
  lines w0.2: -77.051,-17.482 -76.838,-17.482 -76.838,-18.542 -76.581,-18.542 ; -47.333,-17.482 -47.12,-17.482 -47.12,-18.542 -46.863,-18.542 ; -23.126,-44.693 -23.126,-43.296 -21.094,-43.296 -21.094,-44.693 ; -17.981,-44.704 -17.981,-43.307 -15.949,-43.307 -15.949,-44.704
  text "18VAC C.T." at -59.487,1.092 h1.02
  text "SET-BACK" at -48.184,1.092 h1.02
  text "Version" at -41.021,-11.811 h1.52
  text ".Version" at -30.099,-11.811 h1.52
  text "CH #1" at -48.196,-36.426 h1.02
  text "CH #2" at -88.455,-36.68 h1.02
  text "8A" at 10.427,-37.922 h1.52 r90
  text "24VAC" at -21.692,-42.139 h1.02
Bottom Overlay:
  text "CH #2" at -75.159,-51.613 h1.02
  text "CH #1" at -35.179,-51.994 h1.02
Mechanical 1:
  lines w0.2: -127.876,-55.499 -33.642,-55.499 ; -123.675,-47 -55,-47 ; -122.034,-21.996 20.485,-21.996

## Dimensions
2.54,0 to 12,-51 on Mechanical 1
-116,-19.46 to 16,-19.46 on Mechanical 1
-100,0 to 0,0 on Mechanical 1
-100,0 to -118.54,-22 on Mechanical 1
-102.54,0 to -123.675,-47 on Mechanical 1
-102.54,0 to -127.876,-55.499 on Mechanical 1

## Text inside footprints (layer, text, board x,y; h text height)
BR1: Top Overlay "~" at -73.754,-2.943 h1.5 r90; Top Overlay "~" at -73.654,-0.643 h1.5 r90; Top Overlay "+" at -76.854,-0.543 h1.5 r90; Top Overlay "-" at -76.954,-2.843 h1.5 r90
JLC_Serial_Number1: Top Overlay "JLCJLCJLCJLC" at -7.328,-50.292 h0.8
Logo1: Top Overlay "OSHW" at -109.918,-21.338 h0.76; Top Overlay "o" at -106.463,-23.954 h10.16
OLED1: Bottom Overlay "SDA" at -82,-21.5 h1.02 r180; Bottom Overlay "SCL" at -82,-19 h1.02 r180; Bottom Overlay "Vcc" at -82,-16.5 h1.02 r180; Bottom Overlay "Gnd" at -82,-14 h1.02 r180; Bottom Overlay "CS" at -82,-29.12 h1.02 r180; Bottom Overlay "DC" at -82,-26.548 h1.02 r180; Bottom Overlay "RES" at -82,-24.048 h1.02 r180